# EAGLE board eBoard_remote_reciever (EAGLE 9.2.1)
REV: F

Size 32.9 x 94.48 mm. Coordinates in mm from the lower left corner, seen from the top.
Outline: 0,94.48 32.86,94.48 32.9,0 0,0 0,94.48
Copper layers (1*16): Top 0.035mm / dielectric 1.5mm / Bottom 0.035mm
Design rules "adafruit *": minimum track width 8mil, minimum drill 15.5mil, track to track 8mil, track to pad 8mil, pad to pad 8mil, via to via 8mil, smd to smd 8mil, copper to edge 10mil, drill to drill 8mil, minimum pad ring 10mil, minimum via ring 8mil, stop-mask expansion 2mil, vias tented up to drill 20mil, thermal gap 10mil
Net classes: 3 usbvcc: width 0.305 mm, drill 0.483 mm, clearance 0.203 mm

## Footprints (pad centres in the part's own frame; a part is rotated, then mirrored left to right if it is on the bottom)
0603-NO = smd 1.075 x 1: 1 -0.85,0; 2 0.85,0
0805-NO = smd 1.24 x 1.5: 1 -0.95,0; 2 0.95,0
_0603MP = smd 0.8 x 0.8: 1 -0.762,0; 2 0.762,0
C0603 = smd 1.1 x 1: 1 -0.85,0; 2 0.85,0
CHIPLED_0805_NOOUTLINE = smd 1.2 x 1.2: A 0,-1.05; C 0,1.05
SOD-323 = smd 1.35 x 0.8: A 1.27,0; C -1.27,0
OLED = drill 0.6 square: GND -17.5,-3.81 | drill 0.6: SCL -17.5,1.27; SDA -17.5,3.81; VCC -17.5,-1.27
1X01_2MM = drill 0.8 pad 1.27: 1 0,0
USB-MICRO-B = smd 0.4 x 1.4: 1 -1.3,-0.7; 2 -0.65,-0.7; 3 0,-0.7; 4 0.65,-0.7; 5 1.3,-0.7 | smd 2.3 x 1.9: G1 4,-3.55; G4 -4,-3.55 | smd 2 x 1.9: G2 1.25,-3.55; G3 -1.25,-3.55
K9-1267B-L = drill 0.8 long: P1 -5.08,0; P2 0,0; P3 5.08,0
SS12D11 = drill 1 long: 1 -4.7,0; 2 0,0; 3 4.7,0
SOLDERJUMPER_CLOSEDWIRE = smd 1.168 x 1.6: 1 -0.762,0; 2 0.762,0 | smd 0.635 x 0.203: WIRE 0,0
BTN_KMR2_4.6X2.8 = smd 0.9 x 0.9: A 2.05,0.8; A' -2.05,0.8; B 2.05,-0.8; B' -2.05,-0.8
BLE_MODULE_RAYTAC_MDBT42 = smd 1.6 x 0.9: 1 -4.6,3.8; 39 4.6,3.8 | smd 1.6 x 0.48: 2 -4.6,0.8; 3 -4.6,0.1; 4 -4.6,-0.6; 5 -4.6,-1.3; 6 -4.6,-2; 7 -4.6,-2.7; 8 -4.6,-3.4; 9 -4.6,-4.1; 10 -4.6,-4.8; 11 -4.6,-5.5; 25 4.6,-6.2; 26 4.6,-5.5; 27 4.6,-4.8; 28 4.6,-4.1; 29 4.6,-3.4; 30 4.6,-2.7; 31 4.6,-2; 32 4.6,-1.3; 33 4.6,-0.6; 34 4.6,0.1; 35 4.6,0.8; 36 4.6,1.5; 37 4.6,2.2; 38 4.6,2.9 | smd 0.48 x 1.6: 12 -4.2,-7.65; 13 -3.5,-7.65; 14 -2.8,-7.65; 15 -2.1,-7.65; 16 -1.4,-7.65; 17 -0.7,-7.65; 18 0,-7.65; 19 0.7,-7.65; 20 1.4,-7.65; 21 2.1,-7.65; 22 2.8,-7.65; 23 3.5,-7.65; 24 4.2,-7.65 | smd 1.2 x 0.5: 40 2.9,3.25; 41 2.9,1.85
SOT23-5 = smd 0.55 x 1.2: 1 -0.95,-1.3; 2 0,-1.3; 3 0.95,-1.3; 4 0.95,1.3; 5 -0.95,1.3
QFN24_4MM_SMSC = smd 0.8 x 0.28: 1 -2,1.25; 2 -2,0.75; 3 -2,0.25; 4 -2,-0.25; 5 -2,-0.75; 6 -2,-1.25; 13 2,-1.25; 14 2,-0.75; 15 2,-0.25; 16 2,0.25; 17 2,0.75; 18 2,1.25 | smd 0.28 x 0.8: 7 -1.25,-2; 8 -0.75,-2; 9 -0.25,-2; 10 0.25,-2; 11 0.75,-2; 12 1.25,-2; 19 1.25,2; 20 0.75,2; 21 0.25,2; 22 -0.25,2; 23 -0.75,2; 24 -1.25,2 | smd 2.5 x 2.5: THERM 0,0
SOT23 = smd 1 x 1.4: 1 -0.95,-1.1; 2 0.95,-1.1; 3 0,1.1
JSTPH2 = smd 1 x 4.6: 1 -1,-3.7; 2 1,-3.7 | smd 1.6 x 3.4: NC1 -3.4,1.5; NC2 3.4,1.5
XTAL3215 = smd 1.1 x 1.9: P$1 1.2,0; P$2 -1.2,0

## Placement (x,y rotation side)
C1  22pF  [0603-NO]  4.62,39.23 270 top
C2  22pF  [0603-NO]  6.98,38.62 180 top
C3  10uF  [0805-NO]  4.32,42.52 270 top
C4  1uF  [0603-NO]  4.46,49.19 90 top
C5  10µF  [0805-NO]  10.05,23.13 180 top
C6  10µF  [0805-NO]  7.53,30.45 90 top
C7  10uf  [0805-NO]  18.94,28.59 0 top
C8  10µF  [0805-NO]  19.03,31.7 0 top
C9  300pF  [_0603MP]  18.8,40.05 270 top
C10  0.1uF  [0603-NO]  19.07,30.19 0 top
C11  0.1uF  [0603-NO]  21.77,21.58 180 top
C12  1nF  [0603-NO]  4.38,29 270 top
C13  300pF  [_0603MP]  18.92,37.13 270 top
C14  10µF  [C0603]  24.32,88.94 90 top
C15  10µF  [C0603]  25.18,83.57 90 top
C16  100n  [C0603]  26.14,88.82 90 top
C17  10µF  [C0603]  25.89,25.75 90 top
CHG  ORANGE  [CHIPLED_0805_NOOUTLINE]  29.99,32.12 270 top
D1  RED  [CHIPLED_0805_NOOUTLINE]  30.36,18.68 90 top
D2  BLUE  [CHIPLED_0805_NOOUTLINE]  4.9,56.94 0 top
D4  1N4148  [SOD-323]  4.22,35.65 270 top
DIS1  OLED  [OLED]  26.49,62.46 270 top
JP1  [1X01_2MM]  17.27,40.75 90 top
JP2  [1X01_2MM]  17.27,38.71 90 top
L2  10uH  [0805-NO]  4.57,46.02 270 top
P1  USB  [USB-MICRO-B]  27.39,25.75 90 top
R1  1K  [0603-NO]  30.45,15.89 180 top
R2  1K  [0603-NO]  4.83,53.51 270 top
R3  1K  [0603-NO]  29.97,35.11 180 top
R4  806K  [0603-NO]  4.18,25.42 90 top
R5  100K  [0603-NO]  5.74,30.26 90 top
R6  2M  [0603-NO]  5.54,25.95 90 top
R7  10K  [0603-NO]  4.22,32.07 270 top
R8  10K  [0603-NO]  10.49,30.01 90 top
R9  1K  [0603-NO]  18.64,21.58 180 top
R10  1K  [0603-NO]  12.96,69.72 0 top
R11  2k2  [0603-NO]  30.24,83.44 90 top
R12  2k2  [0603-NO]  27.8,83.44 90 top
S1  K9-1267B-L  [K9-1267B-L]  9.29,69.86 270 bottom
S2  [SS12D11]  16.78,11.03 180 top
SJ2  BAT  [SOLDERJUMPER_CLOSEDWIRE]  13.61,34.02 0 top
SW1  KMR2  [BTN_KMR2_4.6X2.8]  16.38,17.7 180 top
SW2  KMR2  [BTN_KMR2_4.6X2.8]  18.92,52.49 90 top
U1  MDBT42  [BLE_MODULE_RAYTAC_MDBT42]  11.05,50.59 0 top
U2  AP2112(3.3V)  [SOT23-5]  8,26.46 180 top
U3  MCP73831T-2ACI/OT  [SOT23-5]  11.44,26.46 0 top
U4  CP2104  [QFN24_4MM_SMSC]  20.12,25.03 180 top
U5  [SOT23]  28.63,89.22 0 top
X2  JSTPH  [JSTPH2]  29.48,10.03 270 top
X4  32.768  [XTAL3215]  7.11,40.43 180 top

## Library data of the parts
C1-C13 CHG D1 D2 D4 JP1 JP2 L2 R1-R12 SJ2 SW1 SW2 U1-U4 X2 = microbuilder
C14-C17 DIS1 S1 S2 U5 = peter
P1 = peter; MPN: 10104110-0001LF; PROD: AMPHENOL FCI
X4 = adafruit2

## Nets
3.3V: C3.1 C8.1 C10.1 C14.1 C15.1 C16.1 D4.C DIS1.VCC R7.2 R10.2 R11.2 R12.2 U1.11 U2.5 U4.5 U4.6 U4.7 U5.1
A0: U5.2
A0/0.02: U1.15
A1/0.03: U1.16
A2/0.04: U1.17
A3/0.05: U1.18
A4/0.28: U1.5
A5/0.29: U1.6
A6/P0.30: U1.7
A7/P0.31: C12.1 R4.2 R6.1 U1.8
DFU: SW2.B SW2.B' U1.34
DTR: C11.2 U4.23
EN: R5.1 U2.3
FRST: U1.38
GND: C1.2 C2.2 C3.2 C4.2 C5.2 C6.2 C7.2 C8.2 C9.2 C10.2 C12.2 C13.2 C14.2 C15.2 C16.2 C17.2 D1.C D2.C DIS1.GND P1.5 P1.G1 P1.G2 P1.G3 P1.G4 R6.2 R8.2 S1.P1 SW1.B SW1.B' SW2.A SW2.A' U1.1 U1.12 U1.24 U1.39 U2.2 U3.2 U4.2 U4.THERM U5.3 X2.1
LED1: R1.2 U1.31
LED2: R2.2 U1.33
MISO: U1.28
MOSI: U1.27
N$1: C1.1 U1.13 X4.P$1
N$2: C2.1 U1.14 X4.P$2
N$3: L2.2 U1.10
N$4: CHG.C R3.1
N$5: D1.A R1.1
N$7: D2.A R2.1
N$8: C4.1 L2.1 U1.9
N$9: R3.2 U3.1
N$10: R8.1 U3.5
N$11: R9.1 U4.21
N$13: C11.1 SJ2.2
N$14: C7.1 U4.16
P0.07: R10.1 S1.P2 U1.20
P0.09/NFC1: C13.1 JP2.1 U1.22
P0.10/NFC2: C9.1 JP1.1 U1.23
P0.11: U1.25
P0.15: U1.29
P0.16: U1.30
P0.27: U1.4
RESET: D4.A R7.1 SJ2.1 SW1.A SW1.A' U1.35
RXD: R9.2 U1.21
SCK: U1.26
SCL: DIS1.SCL R12.1 U1.3
SDA: DIS1.SDA R11.1 U1.2
SWCLK: U1.36
SWDIO: U1.37
SWO: U1.32
TXD: U1.19 U4.20
USBD+: P1.3 U4.3
USBD-: P1.2 U4.4
VBAT: C6.1 R4.1 R5.2 S2.2 U2.1 X2.2
VBAT_PRESWITCH: C5.1 S2.1 U3.3
VBUS: C17.1 CHG.A P1.1 U3.4 U4.8

## Tracks (layer width: path | path; a pad name or v marks a point on that pad's centre or on a via)
3.3V  (17 unrouted)
A7/P0.31  (3 unrouted)
DFU  (2 unrouted)
DTR  (1 unrouted)
EN  (1 unrouted)
GND  (40 unrouted)
LED1  (1 unrouted)
LED2  (1 unrouted)
N$1  (2 unrouted)
N$2  (2 unrouted)
N$3  (1 unrouted)
N$4  (1 unrouted)
N$5  (1 unrouted)
N$7  (1 unrouted)
N$8  (2 unrouted)
N$9  (1 unrouted)
N$10  (1 unrouted)
N$11  (1 unrouted)
N$13  (1 unrouted)
N$14  (1 unrouted)
P0.07  (2 unrouted)
P0.09/NFC1  (2 unrouted)
P0.10/NFC2  (2 unrouted)
RESET  (5 unrouted)
RXD  (1 unrouted)
SCL  (2 unrouted)
SDA  (2 unrouted)
TXD  (1 unrouted)
USBD+  (1 unrouted)
USBD-  (1 unrouted)
VBAT  (5 unrouted)
VBAT_PRESWITCH  (2 unrouted)
VBUS  (4 unrouted)